# EAGLE board Lid-v3-Panel (EAGLE 9.5.2)

Size 596.87 x 448.18 mm. Coordinates in mm from the lower left corner, seen from the top.
Outline: 3397 segments
Outline: circle at 46.33,417.19 radius 25.93
Outline: circle at 38.58,433.96 radius 1.27
Outline: circle at 38.58,422.53 radius 1.4
Outline: circle at 53.82,433.96 radius 1.27
Outline: circle at 53.82,422.53 radius 1.4
Outline: circle at 131.42,417.19 radius 25.93
Outline: circle at 139.16,433.96 radius 1.27
Outline: circle at 139.16,422.53 radius 1.4
Outline: circle at 123.92,433.96 radius 1.27
Outline: circle at 123.92,422.53 radius 1.4
Outline: circle at 46.33,354.97 radius 25.93
Outline: circle at 38.58,338.2 radius 1.27
Outline: circle at 38.58,349.63 radius 1.4
Outline: circle at 53.82,338.2 radius 1.27
Outline: circle at 53.82,349.63 radius 1.4
Outline: circle at 131.42,354.97 radius 25.93
Outline: circle at 139.16,338.2 radius 1.27
Outline: circle at 139.16,349.63 radius 1.4
Outline: circle at 123.92,338.2 radius 1.27
Outline: circle at 123.92,349.63 radius 1.4
Copper layers (1*16): Top 0.035mm / dielectric 0.15mm / Bottom 0.035mm
Design rules "default": minimum track width 6mil, minimum drill 0.35mm, track to track 6mil, track to pad 6mil, pad to pad 6mil, via to via 6mil, smd to smd 6mil, copper to edge 40mil, drill to drill 6mil, minimum pad ring 10mil, minimum via ring 8mil, stop-mask expansion 4mil, vias tented up to drill 0mil, thermal gap 10mil

## Placement (x,y rotation side)
E$1  [MICRO_SERVO]  168.02,403.1 102 bottom
E$2  [MICRO_SERVO]  9.72,403.1 102 top
E$3  [MICRO_SERVO]  9.72,369.06 282 bottom
E$4  [MICRO_SERVO]  168.02,369.06 282 top
E$5  [MICRO_SERVO]  188.79,403.1 102 top
E$6  [MICRO_SERVO]  347.09,403.1 102 bottom
E$7  [MICRO_SERVO]  188.79,369.06 282 bottom
E$8  [MICRO_SERVO]  347.09,369.06 282 top
E$9  [MICRO_SERVO]  367.86,403.1 102 top
E$10  [MICRO_SERVO]  526.16,403.1 102 bottom
E$11  [MICRO_SERVO]  367.86,369.06 282 bottom
E$12  [MICRO_SERVO]  526.16,369.06 282 top
E$13  [MICRO_SERVO]  168.02,17.02 102 bottom
E$14  [MICRO_SERVO]  50.36,291.34 102 top
E$15  [MICRO_SERVO]  208.66,291.34 102 bottom
E$16  [MICRO_SERVO]  50.36,257.3 282 bottom
E$17  [MICRO_SERVO]  208.66,257.3 282 top
E$18  [MICRO_SERVO]  229.43,291.34 102 top
E$19  [MICRO_SERVO]  387.73,291.34 102 bottom
E$20  [MICRO_SERVO]  229.43,257.3 282 bottom
E$21  [MICRO_SERVO]  387.73,257.3 282 top
E$22  [MICRO_SERVO]  408.5,291.34 102 top
E$23  [MICRO_SERVO]  566.8,291.34 102 bottom
E$24  [MICRO_SERVO]  408.5,257.3 282 bottom
E$25  [MICRO_SERVO]  566.8,257.3 282 top
E$26  [MICRO_SERVO]  9.72,179.58 102 top
E$27  [MICRO_SERVO]  168.02,179.58 102 bottom
E$28  [MICRO_SERVO]  9.72,145.54 282 bottom
E$29  [MICRO_SERVO]  168.02,145.54 282 top
E$30  [MICRO_SERVO]  188.79,179.58 102 top
E$31  [MICRO_SERVO]  347.09,179.58 102 bottom
E$32  [MICRO_SERVO]  188.79,145.54 282 bottom
E$33  [MICRO_SERVO]  347.09,145.54 282 top
E$34  [MICRO_SERVO]  367.86,179.58 102 top
E$35  [MICRO_SERVO]  526.16,179.58 102 bottom
E$36  [MICRO_SERVO]  367.86,145.54 282 bottom
E$37  [MICRO_SERVO]  526.16,145.54 282 top
E$38  [MICRO_SERVO]  50.36,67.82 102 top
E$39  [MICRO_SERVO]  208.66,67.82 102 bottom
E$40  [MICRO_SERVO]  578.58,420.78 12 bottom
E$41  [MICRO_SERVO]  579.85,198.53 12 bottom
E$42  [MICRO_SERVO]  229.43,67.82 102 top
E$43  [MICRO_SERVO]  387.73,67.82 102 bottom
E$44  [MICRO_SERVO]  526.16,17.02 102 bottom
E$45  [MICRO_SERVO]  347.09,17.02 102 bottom
E$46  [MICRO_SERVO]  408.5,67.82 102 top
E$47  [MICRO_SERVO]  566.8,67.82 102 bottom

## Library data of the parts
E$1-E$47 = lid